# Altium PCB CT310高端控制盒基板电路V1.1.PcbDoc (part 1 of 3)
Units mil, origin at the board's own origin, x right, y up, seen from the top; angles counter-clockwise.
Board outline 8162.61 x 6196.81 mil, 2 copper layers (Top Layer, Bottom Layer), stack 65.792 mil thick; 275 components, 181 nets, 942 pads, 304 vias.
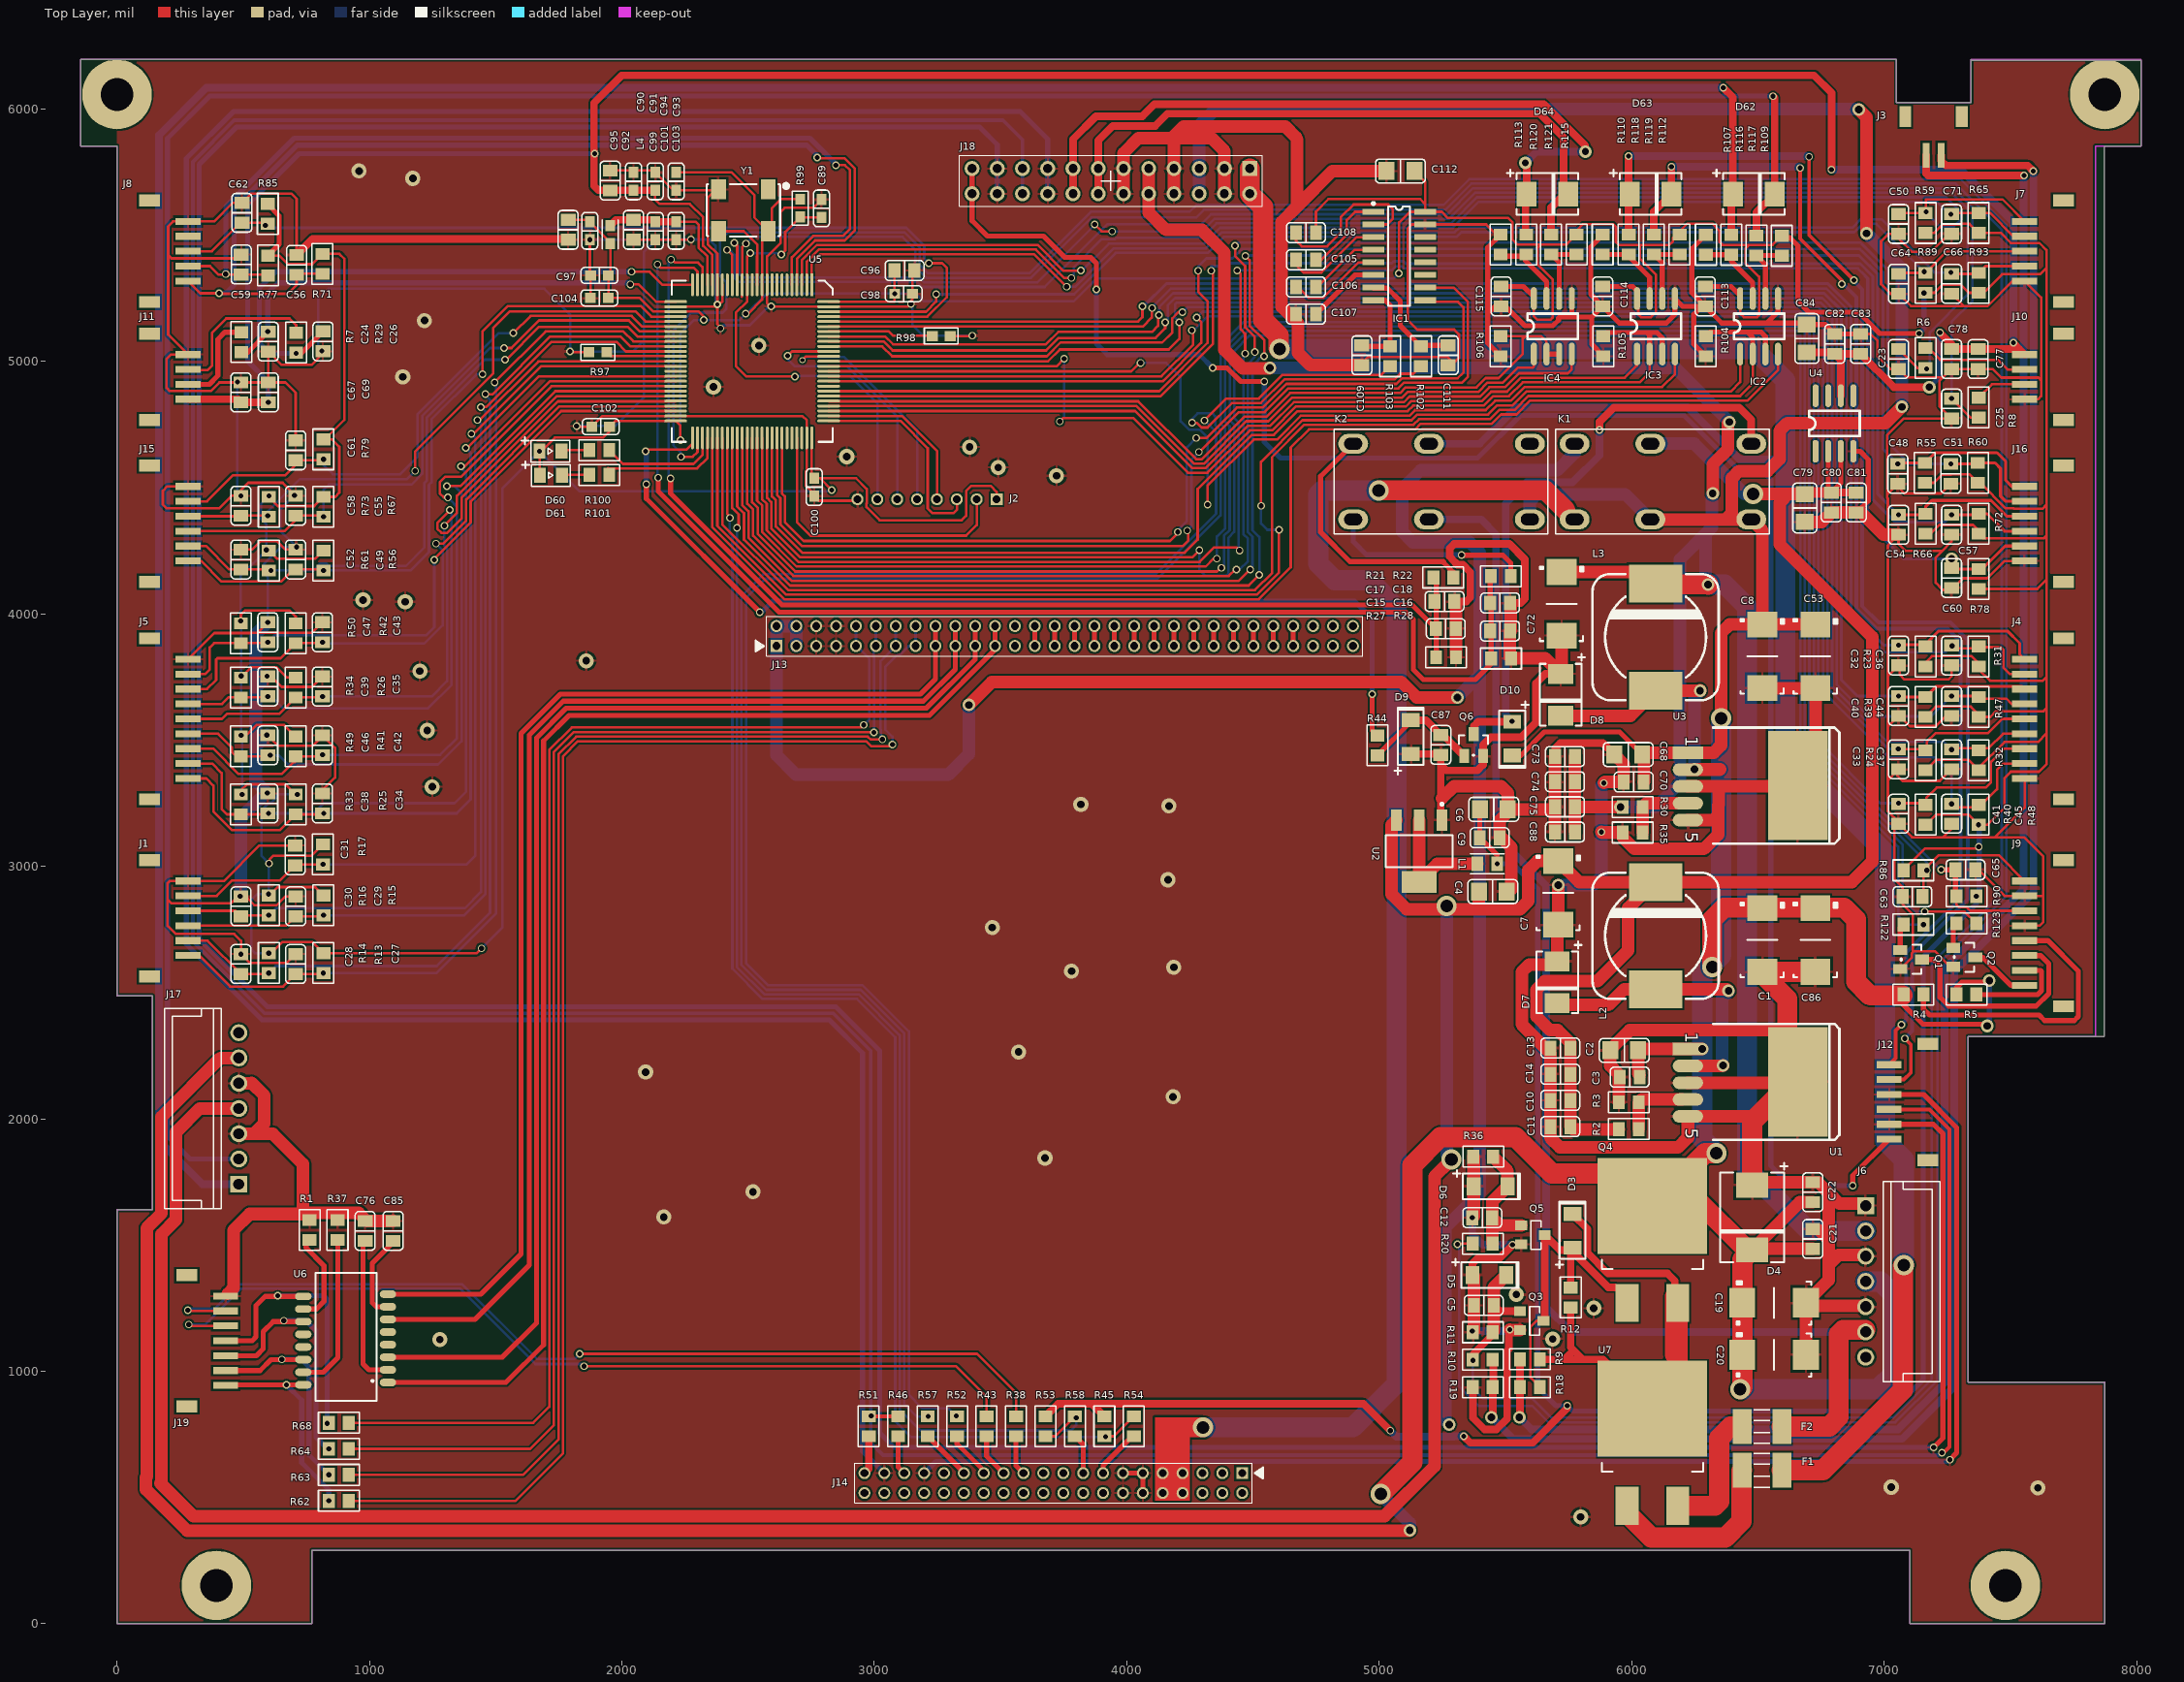
[diagram p0: Top Layer view]
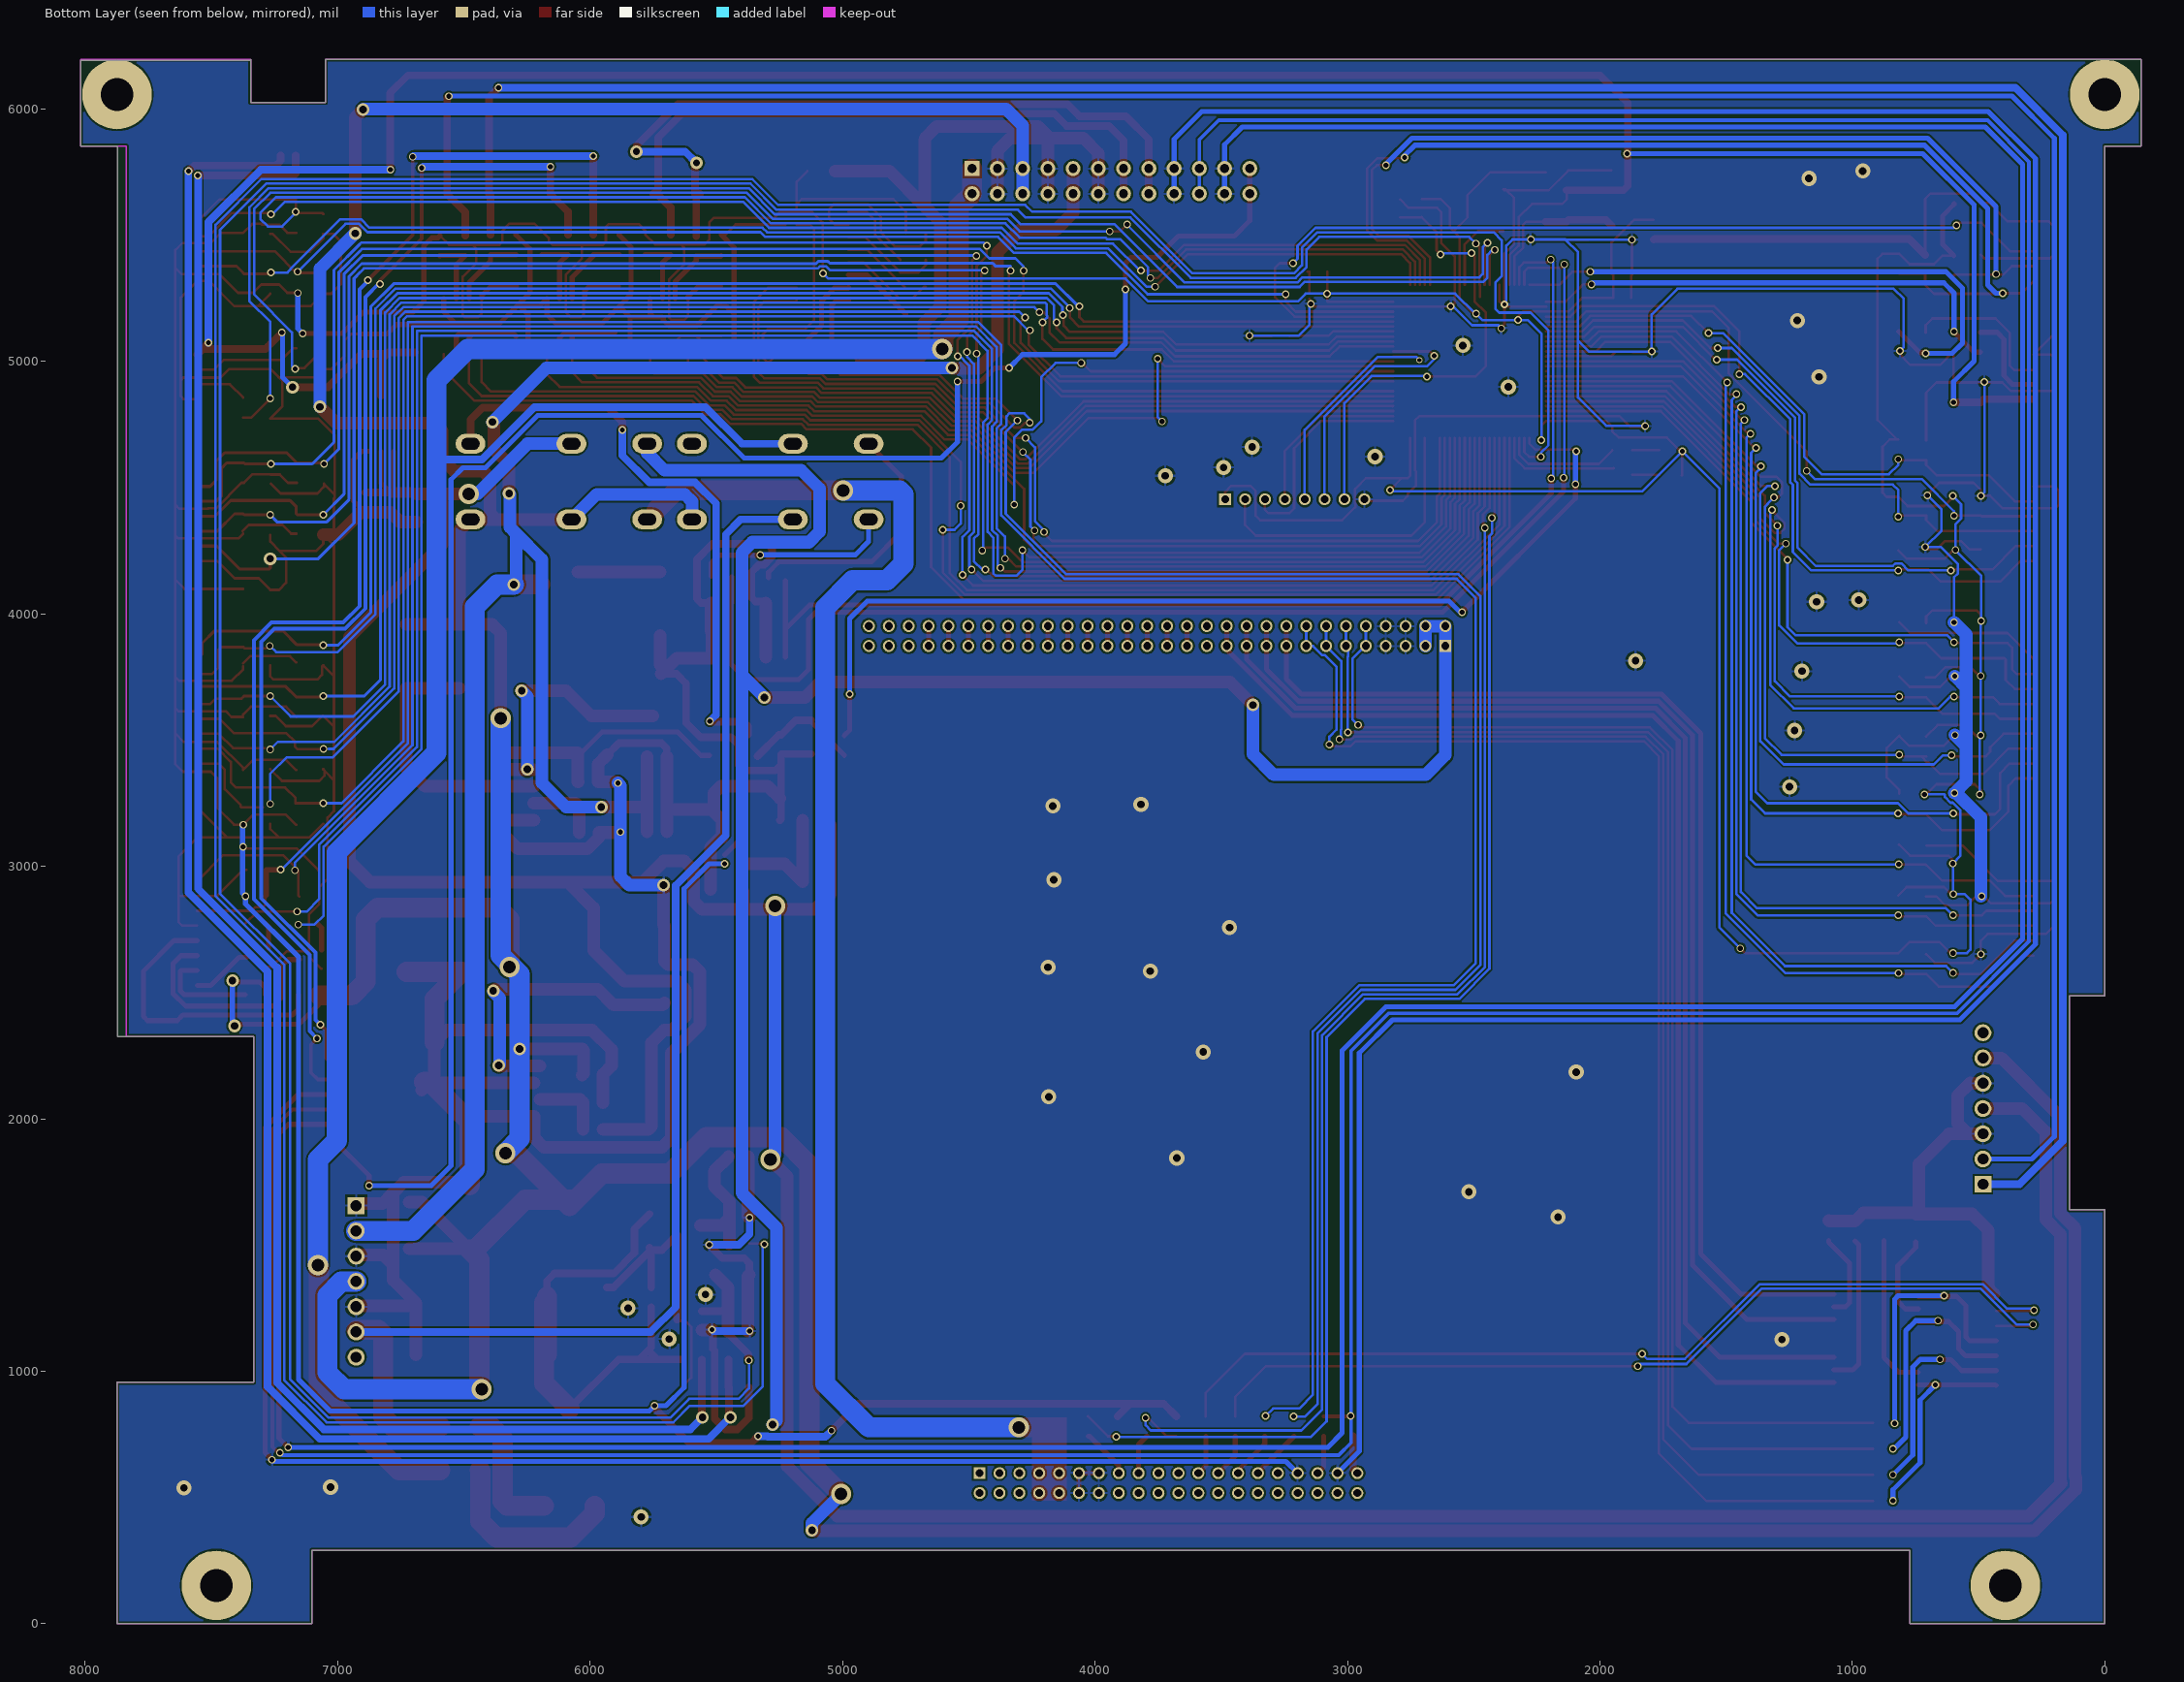
[diagram p1: Bottom Layer view, seen from below]
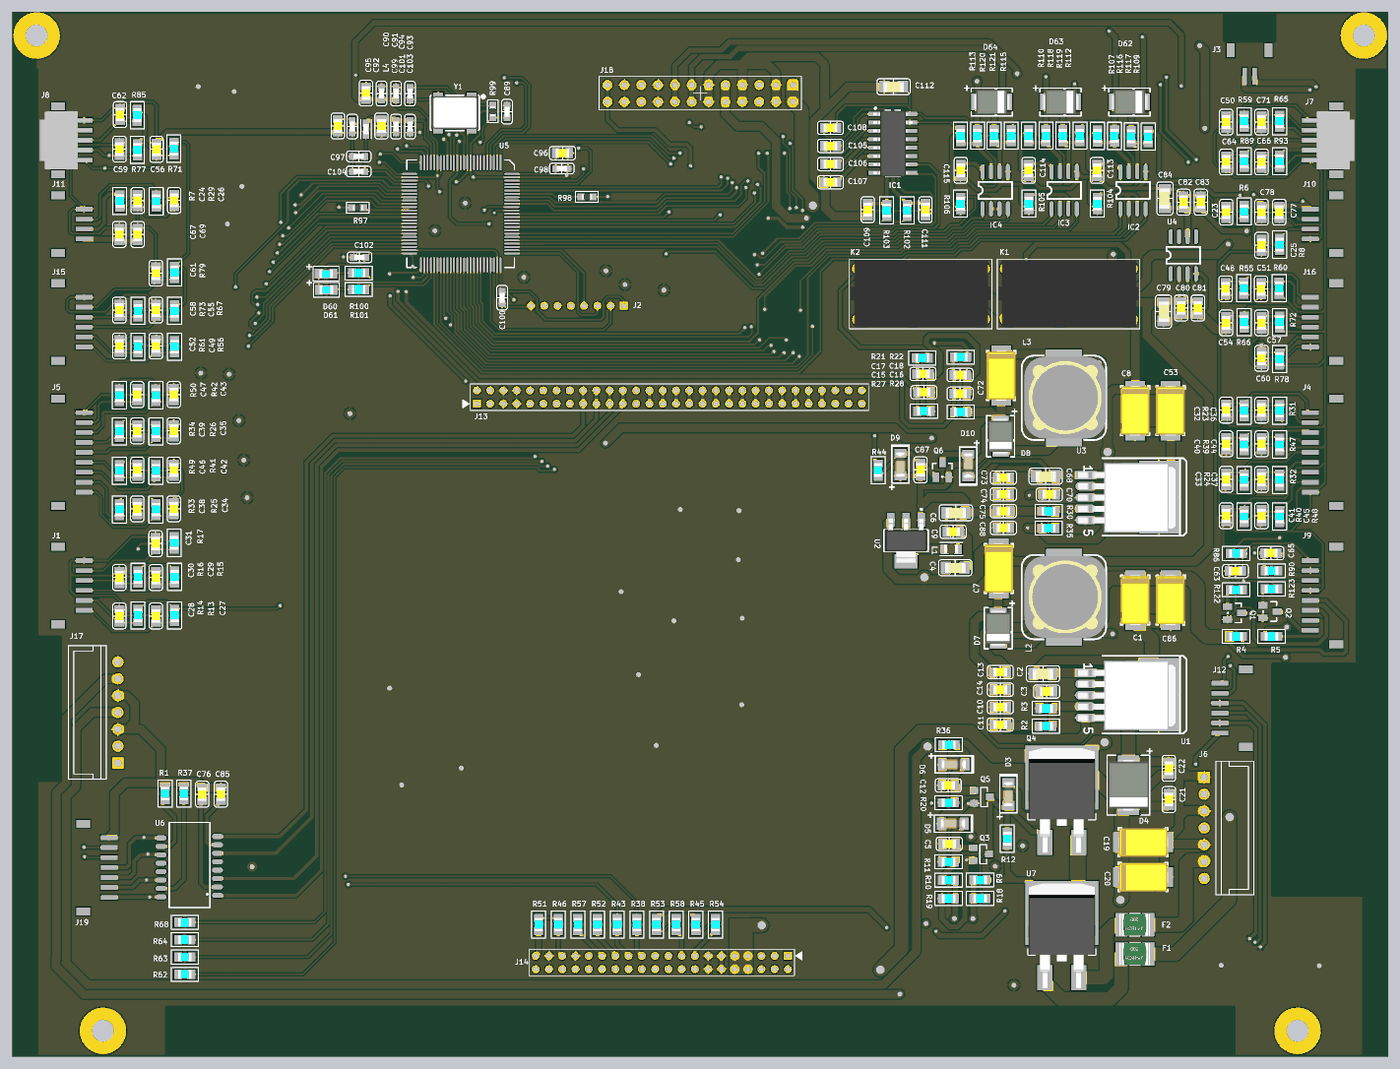
[diagram p4: 3D render of the assembled board from above, using the file's embedded part models]

## Layer stack, top to bottom
Top Layer: signal copper 1.4
Dielectric: core 62.9921, FR-4, Dk 4.8
Bottom Layer: signal copper 1.4

## Board outline
-144.3,5853 0,5853 0,2487 140.7,2487 140.7,1640 1.7,1640 0,1640 0,0 772.7,0 772.7,291.3 7101.31,291.3 7101.31,289 7101.31,0 7874.02,0 7874.02,5 7874.02,957 7332.7,957 7332.7,963 7332.7,2326 7872.7,2326 7872.7,5853 8018.31,5853 8018.31,6193 7344.7,6193 7344.7,6196.81 7344.7,6026 7048.7,6026 7048.7,6196.81 -144.3,6196.81 -144.3,5853

## Design rules (kind name [scope] priority, off if disabled: settings)
Clearance [All] p1: gap=8
HoleSize [All] p1: absolutevalues=TRUE maxlimit=200 minlimit=1 maxpercent=80.000 minpercent=20.000
PolygonConnect [All] p1: connectstyle=Relief reliefconductorwidth=10 reliefentries=4 polygonreliefangle="90 Angle" airgapwidth=10
RoutingVias [All] p1: holewidth=28 width=50 viastyle="Through Hole" minholewidth=16 minwidth=23 maxholewidth=50 maxwidth=100
SilkToSilkClearance [All] p1: silktosilkclearance=0
SilkToSolderMaskClearance SilkscreenOverComponentPads [IsPad] p1: minsilkscreentomaskgap=0 clearancetoexposedcopper=TRUE
SolderMaskExpansion [All] p1: expansion=4
Width [All] p1: maxlimit=100 minlimit=8 preferedwidth=10 minimp=50.000000 maximp=50.000000 favimp=50.000000
25 further rules are at their usual default settings.

## Classes and differential pairs
component class DataVideoPort: J18
component class TTL_TO_RS485: C113 C114 C115 D62 D63 D64 IC2 IC3 IC4 R104 R105 R106 R107 R109 R110 R112 R113 R115 R116 R117 R118 R119 R120 R121
component class TTL_TO_RS232: C105 C106 C107 C108 C109 C111 C112 IC1 R102 R103
component class RightInterface: J6 J12
component class Processor: C89 C90 C91 C92 C93 C94 C95 C96 C97 C98 C99 C100 C101 C102 C103 C104 D60 D61 J2 L4 R97 R98 R99 R100 R101 U5 Y1
component class PowerConvert: C1 C2 C3 C4 C6 C7 C8 C9 C10 C11 C13 C14 C53 C68 C70 C72 C73 C74 C75 C79 C80 C81 C82 C83 C84 C86 C88 D7 D8 L1 L2 L3 R2 R3 R30 R35 U1 U2 U3 U4
component class OmapSystem: J13 J14 P14 R38 R43 R45 R46 R51 R52 R53 R54 R57 R58
component class LeftInterface: C76 C85 J17 J19 R1 R37 R62 R63 R64 R68 U6
component class KeyInput_MG: C50 C56 C59 C62 C63 C64 C65 C66 C71 J7 J8 J9 P6 Q1 Q2 R4 R5 R59 R65 R71 R77 R85 R86 R89 R90 R93 R122 R123
component class KeyInput_IJMEF: C48 C49 C51 C52 C54 C55 C57 C58 C60 C61 J15 J16 R55 R56 R60 R61 R66 R67 R72 R73 R78 R79
component class KeyInput_ABH: C27 C28 C29 C30 C31 C32 C33 C34 C35 C36 C37 C38 C39 C40 C41 C42 C43 C44 C45 C46 C47 J1 J4 J5 R13 R14 R15 R16 R17 R23 R24 R25 R26 R31 R32 R33 R34 R39 R40 R41 R42 R47 R48 R49 R50
component class JoyStickAdcInput: C23 C24 C25 C26 C67 C69 C77 C78 J10 J11 R6 R7 R8 R29
component class PowerManager: C5 C12 C15 C16 C17 C18 C19 C20 C21 C22 C87 D3 D4 D5 D6 D9 D10 F1 F2 J3 K1 K2 Q3 Q4 Q5 Q6 R9 R10 R11 R12 R18 R19 R20 R21 R22 R27 R28 R36 R44 U7

## Components (designator, comment, footprint, x,y, rotation, side; value= is the part's Value field where it differs from the comment)
C1 "100uF/25V" CT7343-E-S 6517.7,2708 r270 top
C2 "2.2uF" C1206 5970.41,2271.3 r0 top
C3 "0.1uF" C0805 5992.06,2165.3 r0 top
C4 "22uF" C1206 5449.7,2900 r0 top
C5 "0.1uF" C0805 5414,1261.3 r0 top
C6 "22uF" C1206 5453.7,3226 r0 top
C7 "100uF/25V" CT7343-E-S 5708.7,2895 r270 top
C8 "100uF/25V" CT7343-E-S 6517.7,3832 r270 top
C9 "0.1uF" C0805 5437.35,3113.3 r180 top
C10 "0.1uF" C0805 5717.41,2072.96 r0 top
C11 "0.1uF" C0805 5717.41,1969.3 r0 top
C12 "100pF" C0805 5408,1608.3 r0 top
C13 "100pF" C0805 5717.41,2280.3 r0 top
C14 "10uF" C0805 5717.41,2176.63 r0 top
C15 "10uF" C0805 5263.41,3941.3 r0 top
C16 "10uF" C0805 5478.41,3932.31 r0 top
C17 "0.1uF" C0805 5258.41,4049.3 r0 top
C18 "0.1uF" C0805 5478.41,4043.3 r0 top
C19 "100uF/25V" CT7343-E-S 6564,1271.3 r0 top
C20 "100uF/25V" CT7343-E-S 6564,1065 r0 top
C21 "0.1uF" C0805 6717,1524.3 r270 top
C22 "10uF" C0805 6717,1709.3 r270 top
C23 "100pF" C0805 7057,5009.36 r270 top
C24 "100pF" C0805 599.35,5078.3 r270 top
C25 "100pF" C0805 7267.02,4813.36 r270 top
C26 "100pF" C0805 816,5079.3 r270 top
C27 "100pF" C0805 707.68,2613.05 r90 top
C28 "100pF" C0805 491.03,2613.05 r90 top
C29 "100pF" C0805 707.68,2841.55 r90 top
C30 "100pF" C0805 491.03,2841.55 r90 top
C31 "100pF" C0805 705.68,3043.3 r90 top
C32 "100pF" C0805 7057,3835.23 r270 top
C33 "100pF" C0805 7057,3424.23 r270 top
C34 "100pF" C0805 814,3249.23 r90 top
C35 "100pF" C0805 814,3712.3 r90 top
C36 "100pF" C0805 7267.02,3835.23 r270 top
C37 "100pF" C0805 7267.02,3424.23 r270 top
C38 "100pF" C0805 597.35,3249.23 r90 top
C39 "100pF" C0805 597.35,3712.3 r90 top
C40 "100pF" C0805 7057,3635.23 r270 top
C41 "100pF" C0805 7057,3208.23 r270 top
C42 "100pF" C0805 814,3479.23 r90 top
C43 "100pF" C0805 814,3927.3 r90 top
C44 "100pF" C0805 7267.02,3635.23 r270 top
C45 "100pF" C0805 7267.02,3208.23 r270 top
C46 "100pF" C0805 597.35,3479.23 r90 top
C47 "100pF" C0805 597.35,3927.3 r90 top
C48 "100pF" C0805 7054,4554.73 r270 top
C49 "100pF" C0805 707.68,4215.23 r90 top
C50 "100pF" C0805 7057,5544.36 r270 top
C51 "100pF" C0805 7264.02,4554.73 r270 top
C52 "100pF" C0805 491.03,4215.23 r90 top
C53 "100uF/25V" CT7343-E-S 6727.7,3832 r270 top
C54 "100pF" C0805 7057,4352.86 r270 top
C55 "100pF" C0805 707.68,4428.23 r90 top
C56 "100pF" C0805 711.61,5382.42 r90 top
C57 "100pF" C0805 7267.02,4352.86 r270 top
C58 "100pF" C0805 491.03,4428.23 r90 top
C59 "100pF" C0805 492.06,5383.58 r90 top
C60 "100pF" C0805 7267.02,4142.23 r270 top
C61 "100pF" C0805 707.68,4647.73 r90 top
C62 "100pF" C0805 494.97,5588.58 r90 top
C63 "100pF" C0805 7112.06,2880.3 r180 top
C64 "100pF" C0805 7057,5307.36 r270 top
C65 "100pF" C0805 7322.06,2986.3 r0 top
C66 "100pF" C0805 7267,5307.36 r270 top
C67 "100pF" C0805 491.03,4877.3 r90 top
C68 "2.2uF" C1206 5985.99,3442.87 r0 top
C69 "1uF" C0805 599.35,4877.3 r90 top
C70 "0.1uF" C0805 6007.64,3334.02 r0 top
C71 "100pF" C0805 7267,5544.36 r270 top
C72 "100uF/25V" CT7343-E-S 5722.7,4040 r270 top
C73 "0.1uF" C0805 5735.7,3435 r0 top
C74 "0.1uF" C0805 5735.7,3335.33 r0 top
C75 "100pF" C0805 5735.7,3235.67 r0 top
C76 "0.01uF" C0805 982.72,1556 r90 top
C77 "100pF" C0805 7372.01,5009.36 r270 top
C78 "1uF" C0805 7267,5009.36 r270 top
C79 "22uF" C1206 6685.41,4419.3 r90 top
C80 "0.1uF" C0805 6790.41,4440.95 r90 top
C81 "100pF" C0805 6889.41,4440.95 r90 top
C82 "100pF" C0805 6804.41,5069.08 r270 top
C83 "0.1uF" C0805 6906.41,5069.08 r270 top
C84 "22uF" C1206 6693.7,5090.73 r270 top
C85 "0.01uF" C0805 1093.7,1556 r90 top
C86 "100uF/25V" CT7343-E-S 6727.7,2708 r270 top
C87 "100pF" C0805 5243.7,3481 r90 top
C88 "10uF" C0805 5735.7,3136 r0 top
C89 "0.1uF" C0603 2790.7,5606 r90 top
C90 "10uF" C0805 1953.7,5716 r90 top
C91 "0.1uF" C0603 2046.06,5713.29 r90 top
C92 "0.1uF" C0603 1873,5517.36 r90 top
C93 "0.1uF" C0603 2215,5713.3 r90 top
C94 "100pF" C0603 2132,5713.29 r90 top
C95 "10uF" C0805 1787,5521.29 r90 top
C96 "10uF" C0805 3119.7,5360 r0 top
C97 "0.1uF" C0603 1911,5340.3 r180 top
C98 "0.1uF" C0603 3115.91,5268.3 r0 top
C99 "10uF" C0805 2046.06,5521.29 r90 top
C100 "0.1uF" C0603 2761.7,4502 r270 top
C101 "0.1uF" C0603 2132,5517.36 r90 top
C102 "0.1uF" C0603 1915.91,4741.3 r180 top
C103 "100pF" C0603 2215,5517.36 r90 top
C104 "0.1uF" C0603 1910.91,5251.3 r180 top
C105 "0.1uF" C0805 4709.65,5402.36 r0 top
C106 "0.1uF" C0805 4709.65,5294.83 r0 top
C107 "15pF" C0805 4709.65,5187.3 r180 top
C108 "0.1uF" C0805 4709.65,5509.89 r180 top
C109 "15pF" C0805 4931,5024.23 r270 top
C111 "15pF" C0805 5273,5024.23 r270 top
C112 "10uF" C1206 5084,5754 r0 top
C113 "0.1uF" C0805 6291.13,5257.58 r90 top
C114 "0.1uF" C0805 5884.95,5257.58 r90 top
C115 "0.1uF" C0805 5482.7,5257.58 r90 top
D3 "ZMM16" SOD-80 5765,1556.3 r90 top
D4 "1.5SMC15A" SMC 6477,1609.3 r270 top
D5 "ZMM1" SOD-80 5436,1381.3 r0 top
D6 "ZMM1" SOD-80 5441,1732.3 r0 top
D7 "SK58" SMB 5704.77,2541 r270 top
D8 "SK58" SMB 5718.7,3680 r270 top
D9 "ZMM1" SOD-80 5124.7,3512 r90 top
D10 "1N4148" SOD-80 5526.7,3506 r270 top
D60 "LED-G" LED0805 1717,4644.3 r0 top
D61 "LED-G" LED0805 1718.96,4548.69 r0 top
D62 "1.5SMC6.8CA" SMB 6483.4,5663.02 r0 top
D63 "1.5SMC6.8CA" SMB 6074.9,5663.02 r0 top
D64 "1.5SMC6.8CA" SMB 5666.4,5663.02 r0 top
F1 "2.5A" F1812 6515.7,608 r180 top
F2 "2.5A" F1812 6515.7,781 r180 top
IC1 "SP3232EEN" SO16-150 5079,5417.3 r270 top
IC2 "SP3078EEN-L/TR" SO-8 6429.73,5029.02 r90 top
IC3 "SP3078EEN-L/TR" SO-8 6021.24,5029.02 r90 top
IC4 "SP3078EEN-L/TR" SO-8 5612.73,5029.02 r90 top
J1 "ZH1X6WT-1.5" ZH1X6WT-1.5 205,2794.35 r90 top
J2 "HD1X8-2.00" SHD1X8-2.00 3208.7,4454 r180 top
J3 "ZH1X2WT-1.5" ZH1X2WT-1.5 7195.7,5893 r0 top
J4 "ZH1X9WT-1.5" ZH1X9WT-1.5 7633,3584.3 r270 top
J5 "ZH1X9WT-1.5" ZH1X9WT-1.5 205,3584.3 r90 top
J6 "DS1X7-2.54" DS1X7H-2.54 6926.7,1356 r90 top
J7 "ZH1X5WT-1.5" ZH1X5WT-1.5 7633,5436.3 r270 top
J8 "ZH1X5WT-1.5" ZH1X5WT-1.5 205,5436.3 r90 top
J9 "ZH1X8WT-1.5" ZH1X8WT-1.5 7633,2735.3 r270 top
J10 "ZH1X4WT-1.5" ZH1X4WT-1.5 7633,4938.69 r270 top
J11 "ZH1X4WT-1.5" ZH1X4WT-1.5 205,4938.69 r90 top
J12 "ZH1X6WT-1.5" ZH1X6WT-1.5 7096.7,2067 r270 top
J13 "HEADER 30X2" HD2X30-2.00 3753.88,3912.24 r0 top
J14 "HEADER 2X20" HD2X20-2.00 3708.93,557.24 r180 top
J15 "ZH1X6WT-1.5" ZH1X6WT-1.5 205,4357.3 r90 top
J16 "ZH1X6WT-1.5" ZH1X6WT-1.5 7633,4357.3 r270 top
J17 "DS1X7-2.54" DS1X7H-2.54 482.7,2041 r270 top
J18 "HD2X12-2.54" HD2X12-2.54 3936.75,5713.97 r180 top
J19 "ZH1X7WT-1.5" ZH1X7WT-1.5 353.7,1121 r90 top
K1 "G6B-2214P-US" G6B-2214P-Us 6123.7,4524 r180 top
K2 "G6B-2214P-US" G6B-2214P-Us 5246.7,4524 r180 top
L1 "10uH" L0805-C 5427.5,3010.3 r180 top
L2 "22uH" L5050-P 6094.7,2725.3 r270 top
L3 "22uH" L5050-P 6094.7,3908 r270 top
L4 "10uH" L0603-C 1954,5502.61 r90 top
Q1 "8050" SOT-23#1 7107.16,2631.3 r270 top
Q2 "8050" SOT-23#1 7317.16,2639.3 r270 top
Q3 "S8050" SOT-23#2 5604,1200.3 r90 top
Q4 "IRF5210S" TO-262 6082,1655.3 r0 top
Q5 "S8050" SOT-23#2 5609,1540.3 r90 top
Q6 "S8050" SOT-23#1 5373.7,3480 r0 top
R1 "75R" R0805 762.7,1559.94 r90 top
R2 "10K" R0805 5988.13,1959.3 r0 top
R3 "3.3K" R0805 5988.13,2065.6 r0 top
R4 "1K" R0805 7116,2492.3 r0 top
R5 "1K" R0805 7326,2492.3 r0 top
R6 "10R" R0805 7163.98,5013.29 r90 top
R7 "10R" R0805 493,5076.3 r90 top
R8 "10R" R0805 7374,4817.3 r90 top
R9 "0R" R0805 5597,1047.3 r0 top
R10 "20K" R0805 5410,1045.95 r180 top
R11 "2K" R0805 5410,1154.61 r0 top
R12 "10K" R0805 5758.11,1292.36 r90 top
R13 "4.7K" R0805 817.97,2616.98 r90 top
R14 "4.7K" R0805 601.32,2616.98 r90 top
R15 "4.7K" R0805 817.97,2845.48 r90 top
R16 "4.7K" R0805 601.32,2845.48 r90 top
R17 "4.7K" R0805 815.97,3047.23 r90 top
R18 "0R(N.C)" R0805 5597,937.3 r0 top
R19 "0R(N.C)" R0805 5410,937.3 r0 top
R20 "1K" R0805 5410,1505.3 r0 top
R21 "20K" R0805 5253.7,4144 r180 top
R22 "20K" R0805 5481.7,4149 r180 top
R23 "4.7K" R0805 7163.98,3831.3 r270 top
R24 "4.7K" R0805 7163.98,3420.3 r270 top
R25 "4.7K" R0805 707.65,3245.3 r90 top
R26 "4.7K" R0805 707.65,3708.36 r90 top
R27 "1K" R0805 5264.41,3828.3 r180 top
R28 "1K" R0805 5482.35,3823.28 r180 top
R29 "10R" R0805 709.65,5074.3 r90 top
R30 "16K" R0805 6003.7,3235.01 r0 top
R31 "4.7K" R0805 7374,3831.3 r270 top
R32 "4.7K" R0805 7374,3420.3 r270 top
R33 "4.7K" R0805 491,3245.3 r90 top
R34 "4.7K" R0805 491,3708.36 r90 top
R35 "3.3K" R0805 6003.7,3134.03 r0 top
R36 "1K" R0805 5411.94,1850 r0 top
R37 "75R" R0805 873.69,1559.94 r90 top
R38 "10R" R0805 3561.04,782 r90 top
R39 "4.7K" R0805 7163.98,3631.3 r270 top
R40 "4.7K" R0805 7163.98,3204.3 r270 top
R41 "4.7K" R0805 707.65,3475.3 r90 top
R42 "4.7K" R0805 707.65,3923.36 r90 top
R43 "10R" R0805 3444.37,782 r90 top
R44 "1K" R0805 4992.7,3479 r270 top
R45 "330R" R0805 3911.04,782 r270 top
R46 "0R" R0805 3094.37,782 r90 top
R47 "4.7K" R0805 7374,3631.29 r270 top
R48 "4.7K" R0805 7374,3204.29 r270 top
R49 "4.7K" R0805 491,3475.3 r90 top
R50 "4.7K" R0805 491,3923.36 r90 top
R51 "0R(NC)" R0805 2977.7,782 r90 top
R52 "10R" R0805 3327.7,782 r90 top
R53 "330R" R0805 3677.7,782 r270 top
R54 "330R" R0805 4027.7,782 r90 top
R55 "4.7K" R0805 7160.98,4558.67 r270 top
R56 "4.7K" R0805 817.97,4211.3 r90 top
R57 "10R" R0805 3211.04,782 r90 top
R58 "330R" R0805 3794.37,782 r90 top
R59 "4.7K" R0805 7163.98,5548.3 r270 top
R60 "4.7K" R0805 7371,4558.67 r270 top
R61 "4.7K" R0805 601.32,4211.3 r90 top
R62 "10R" R0805 878.7,487 r0 top
R63 "10R" R0805 878.7,590 r0 top
R64 "10R" R0805 878.7,693 r0 top
R65 "4.7K" R0805 7373.98,5548.3 r270 top
R66 "4.7K" R0805 7163.98,4356.8 r270 top
R67 "4.7K" R0805 817.97,4424.29 r90 top
R68 "10R" R0805 878.7,796 r0 top
R71 "4.7K" R0805 814.03,5386.36 r90 top
R72 "4.7K" R0805 7374,4356.8 r270 top
R73 "4.7K" R0805 601.32,4424.29 r90 top
R77 "4.7K" R0805 598.41,5379.64 r90 top
R78 "4.7K" R0805 7374,4138.3 r270 top
R79 "4.7K" R0805 817.97,4651.67 r90 top
R85 "4.7K" R0805 597.39,5584.64 r90 top
R86 "4.7K" R0805 7116,2984.3 r180 top
R89 "4.7K" R0805 7163.98,5311.3 r270 top
R90 "4.7K" R0805 7326,2881.77 r0 top
R93 "4.7K" R0805 7373.98,5311.3 r270 top
R97 "10K" R0603 1905,5036.3 r180 top
R98 "10K" R0603 3264.7,5100.3 r180 top
R99 "10K" R0603 2706,5607.3 r270 top
R100 "470R" R0805 1910.91,4648.3 r180 top
R101 "470R" R0805 1910.91,4550.69 r180 top
R102 "10R" R0805 5165,5020.3 r270 top
R103 "10R" R0805 5043,5020.3 r270 top
R104 "10K" R0805 6293.1,5060.02 r270 top
R105 "10K" R0805 5886.92,5060.02 r270 top
R106 "10K" R0805 5480.73,5060.02 r270 top
R107 "10K" R0805 6293.73,5462.02 r90 top
R109 "10K" R0805 6594.73,5458.02 r270 top
R110 "10K" R0805 5884.73,5463.01 r90 top
R112 "10K" R0805 6189.73,5463.02 r270 top
R113 "10K" R0805 5480.73,5463.01 r90 top
R115 "10K" R0805 5781.73,5463.01 r270 top
R116 "10R" R0805 6394.73,5462.02 r270 top
R117 "10R" R0805 6493.73,5459.02 r270 top
R118 "10R" R0805 5987.73,5463.02 r270 top
R119 "10R" R0805 6087.73,5463.02 r270 top
R120 "10R" R0805 5582.28,5463.02 r270 top
R121 "10R" R0805 5680.73,5463.02 r270 top
R122 "1K" R0805 7116,2769.3 r0 top
R123 "1K" R0805 7326,2774.3 r0 top
U1 "LM2596_ADJ" TO263 6222.6,2276.3 r270 top
U2 "AMS1117-3.3" SOT-223 5158,3060.3 r180 top
U3 "LM2596_ADJ" TO263 6222.6,3449.83 r270 top
U4 "REF192" SO-8 6728.41,4644.02 r90 top
U5 "STM32F103VCT6" STM32F103VCT6 2516,5000.3 r270 top
U6 "H1102NL" SOP16 905.7,1126 r180 top
U7 "MBRB60H100CTT4G" TO-262 6082,852 r0 top
Y1 "XTAL 8MHz" "XTAL 5.0X7.0-SM" 2481,5598.3 r180 top

## Footprints (in the part's own frame and the unit in brackets; to place one, negate y for a bottom-side part, rotate by r counter-clockwise, add the part's x,y. Pads: shape width x height; smd on the part's side, far side on the other; paste and mask are expansions set on the pad)
C0603 [mm]
  rect 1.1x1 smd: 1(-0.9,0) 2(0.9,0)
  silkscreen extent -1.85,-0.8 1.85,0.8, body extent -0.76,-0.39 0.76,0.38, height 0.46
C0805 [mm]
  rect 1.2x1.5 smd: 1(-1,0) 2(1,0)
  silkscreen extent -1.95,-1 1.95,1, body extent -1.02,-0.64 1.02,0.64, height 0.61
C1206 [mm]
  rect 1.6x1.8 smd: 1(-1.4,0) 2(1.4,0)
  silkscreen extent -2.5,-1.2 2.5,1.2, body extent -1.52,-0.82 1.52,0.71, height 0.61
CT7343-E-S [mm]
  rect 2.6x3 smd: 1(-3.2,0) 2(3.2,0)
  silkscreen extent -3.75,-2.2 3.75,2.2, body extent -3.75,-2.2 3.75,2.12, height 4
DS1X7H-2.54 [mm]
  rect 1.7x1.7 hole 1.1: 1(7.62,0)
  round 1.7 hole 1.1: 2(5.08,0) 3(2.54,0) 4(0,0) 5(-2.54,0) 6(-5.08,0) 7(-7.62,0)
  silkscreen extent -10.08,-7.47 10.06,-1.77
F1812 [mm]
  rect 1.9x3.5 smd: 1(-2,0) 2(2,0)
  silkscreen extent -0.8,-1.7 0.8,1.7, body extent -2.29,-1.65 2.31,1.65, height 0.69
G6B-2214P-Us [mm]
  oval 3x2 hole 1.2 slot 1.8 at 0 deg: 1(-8.89,-3.81) 3(1.27,-3.81) 4(8.89,-3.81) 5(8.89,3.81) 6(1.27,3.81) 8(-8.89,3.81)
  silkscreen extent -10.69,-5.26 10.79,5.26, body extent -10.48,-5.08 10.62,4.92, height 12.5
HD2X12-2.54 [mm]
  rect 1.5x1.5 hole 0.9: 1(-13.97,-1.27)
  round 1.5 hole 0.9: 2(-13.97,1.27) 3(-11.43,-1.27) 4(-11.43,1.27) 5(-8.89,-1.27) 6(-8.89,1.27) 7(-6.35,-1.27) 8(-6.35,1.27) 9(-3.81,-1.27) 10(-3.81,1.27) 11(-1.27,-1.27) 12(-1.27,1.27) 13(1.27,-1.27) 14(1.27,1.27) 15(3.81,-1.27) 16(3.81,1.27) 17(6.35,-1.27) 18(6.35,1.27) 19(8.89,-1.27) 20(8.89,1.27) 21(11.43,-1.27) 22(11.43,1.27) 23(13.97,-1.27) 24(13.97,1.27)
  silkscreen extent -15.24,-2.57 15.24,2.51
HD2X20-2.00 [mm]
  rect 1.2x1.2 hole 0.8: 1(-19,-1)
  round 1.2 hole 0.8: 2(-19,1) 3(-17,-1) 4(-17,1) 5(-15,-1) 6(-15,1) 7(-13,-1) 8(-13,1) 9(-11,-1) 10(-11,1) 11(-9,-1) 12(-9,1) 13(-7,-1) 14(-7,1) 15(-5,-1) 16(-5,1) 17(-3,-1) 18(-3,1) 19(-1,-1) 20(-1,1) 21(1,-1) 22(1,1) 23(3,-1) 24(3,1) 25(5,-1) 26(5,1) 27(7,-1) 28(7,1) 29(9,-1) 30(9,1) 31(11,-1) 32(11,1) 33(13,-1) 34(13,1) 35(15,-1) 36(15,1) 37(17,-1) 38(17,1) 39(19,-1) 40(19,1)
  silkscreen extent -21.09,-2.01 20,1.99
HD2X30-2.00 [mm]
  rect 1.2x1.2 hole 0.8: 1(-29,-1)
  round 1.2 hole 0.8: 2(-29,1) 3(-27,-1) 4(-27,1) 5(-25,-1) 6(-25,1) 7(-23,-1) 8(-23,1) 9(-21,-1) 10(-21,1) 11(-19,-1) 12(-19,1) 13(-17,-1) 14(-17,1) 15(-15,-1) 16(-15,1) 17(-13,-1) 18(-13,1) 19(-11,-1) 20(-11,1) 21(-9,-1) 22(-9,1) 23(-7,-1) 24(-7,1) 25(-5,-1) 26(-5,1) 27(-3,-1) 28(-3,1) 29(-1,-1) 30(-1,1) 31(1,-1) 32(1,1) 33(3,-1) 34(3,1) 35(5,-1) 36(5,1) 37(7,-1) 38(7,1) 39(9,-1) 40(9,1) 41(11,-1) 42(11,1) 43(13,-1) 44(13,1) 45(15,-1) 46(15,1) 47(17,-1) 48(17,1) 49(19,-1) 50(19,1) 51(21,-1) 52(21,1) 53(23,-1) 54(23,1) 55(25,-1) 56(25,1) 57(27,-1) 58(27,1) 59(29,-1) 60(29,1)
  silkscreen extent -31.09,-2.01 30,1.99
L0603-C [mm]
  rect 1.1x1 smd: 1(-0.9,0) 2(0.9,0)
  silkscreen extent -1.45,-0.8 1.45,0.8, body extent -0.76,-0.39 0.76,0.38, height 0.46
L0805-C [mm]
  rect 1.2x1.5 smd: 1(-1,0) 2(1,0)
  silkscreen extent -1.7,-1 1.7,1, body extent -0.95,-0.65 1.08,0.63, height 0.61
L5050-P [mm]
  rect 3.8x5.4 smd: 1(-5.4,0) 2(5.4,0)
  silkscreen extent -6.35,-6.35 6.35,6.35, body extent -6.18,-5.97 6.12,6.33, height 6
LED0805 [mm]
  rect 1.2x1.5 smd: 1(-1.1,0) 2(1.1,0)
  silkscreen extent -2.9,-1.1 1.95,1.4, body extent -1.02,-0.64 1.02,0.64, height 0.56
R0603 [mm]
  rect 1.1x1 smd: 1(-0.9,0) 2(0.9,0)
  silkscreen extent -1.7,-0.8 1.7,0.8, body extent -0.79,-0.39 0.74,0.38, height 0.46
R0805 [mm]
  rect 1.2x1.4 smd: 1(-1,0) 2(1,0)
  silkscreen extent -2.05,-1.05 2.05,1.05, body extent -1.02,-0.65 1.02,0.62, height 0.61
SHD1X8-2.00 [mm]
  rect 1.2x1.2 hole 0.762: 1(-7,0)
  round 1.2 hole 0.762: 2(-5,0) 3(-3,0) 4(-1,0) 5(1,0) 6(3,0) 7(5,0) 8(7,0)
SMB [mm]
  rect 2x2.5 smd: 1(-2.1,0) 2(2.1,0)
  silkscreen extent -4.1,-2.1 3.1,2.45, body extent -2.79,-1.91 2.81,1.89, height 2.4
SMC [mm]
  rect 2.5x3.2 smd: 1(-3.25,0) 2(3.25,0)
  silkscreen extent -5.5,-3.2 4.5,3.55, body extent -3.8,-3.1 3.8,3.12, height 2.8
SO16-150 [mm]
  rect 0.6x2.2 smd: 1(-4.445,-2.6) 2(-3.175,-2.6) 3(-1.905,-2.6) 4(-0.635,-2.6) 5(0.635,-2.6) 6(1.905,-2.6) 7(3.175,-2.6) 8(4.445,-2.6) 9(4.445,2.6) 10(3.175,2.6) 11(1.905,2.6) 12(0.635,2.6) 13(-0.635,2.6) 14(-1.905,2.6) 15(-3.175,2.6) 16(-4.445,2.6)
  silkscreen extent -5.42,-2.72 5,1.1, body extent -4.95,-2.92 5.02,3.02, height 1.35
SO-8 [mil]
  oval 90x24 smd: 1(0.04,0.29) 2(0.04,-49.71) 3(0.04,-99.71) 4(0.04,-149.71) 5(220.04,-149.71) 6(220.04,-99.71) 7(220.04,-49.71) 8(220.04,0.29)
  silkscreen extent 60,-175 160,25
SOD-80 [mm]
  rect 1.4x1.8 smd: 1(-1.7,0) 2(1.7,0)
  silkscreen extent -3.75,-1.3 3.03,1.65, body extent -1.85,-0.79 1.85,0.81, height 1.6
SOP16 [mm]
  oval 1.65x0.76 smd: 1(-4.257,4.331) 2(-4.257,3.061) 3(-4.257,1.791) 4(-4.257,0.521) 5(-4.257,-0.749) 6(-4.257,-2.019) 7(-4.257,-3.289) 8(-4.257,-4.559) 9(4.257,-4.331) 10(4.257,-3.061) 11(4.257,-1.791) 12(4.257,-0.521) 13(4.257,0.749) 14(4.257,2.019) 15(4.257,3.289) 16(4.257,4.559)
  silkscreen extent -3.13,-6.68 3.02,6.17
SOT-23#1 [mm]
  rect 1x1.4 smd: 1(-0.95,-1.1) 2(0.95,-1.1) 3(0,1.1)
  silkscreen extent -1.47,-1.02 1.45,1, body extent -1.41,-1 1.38,1.42, height 1.09
SOT-23#2 [mm] "SOT-23"
  rect 1x1.2 smd: 1(0.953,1.175) 2(-0.953,1.175) 3(-0.013,-1.175)
  silkscreen extent -1.46,-0.81 1.44,0.21
SOT-223 [mm]
  rect 1.1x2.15 smd: 1(-2.3,-3.1) 2(0,-3.1) 3(2.3,-3.1)
  rect 3.5x2.15 smd: 4(0,3.1)
  silkscreen extent -3.35,-4.85 3.35,1.63, body extent -3.15,-3.3 3.15,3.3, height 1.8
STM32F103VCT6 [mil]
  rect 90x11.5 smd: 1(-303.15,236.22)
  oval 90x11.5 smd: 2(-303.15,216.53) 3(-303.15,196.85) 4(-303.15,177.16) 5(-303.15,157.48) 6(-303.15,137.8) 7(-303.15,118.11) 8(-303.15,98.43) 9(-303.15,78.74) 10(-303.15,59.06) 11(-303.15,39.37) 12(-303.15,19.68) 13(-303.15,0) 14(-303.15,-19.69) 15(-303.15,-39.37) 16(-303.15,-59.06) 17(-303.15,-78.74) 18(-303.15,-98.43) 19(-303.15,-118.11) 20(-303.15,-137.8) 21(-303.15,-157.48) 22(-303.15,-177.17) 23(-303.15,-196.85) 24(-303.15,-216.53) 25(-303.15,-236.22) 51(303.15,-236.22) 52(303.15,-216.53) 53(303.15,-196.85) 54(303.15,-177.16) 55(303.15,-157.48) 56(303.15,-137.8) 57(303.15,-118.11) 58(303.15,-98.43) 59(303.15,-78.74) 60(303.15,-59.06) 61(303.15,-39.37) 62(303.15,-19.69) 63(303.15,0) 64(303.15,19.68) 65(303.15,39.37) 66(303.15,59.06) 67(303.15,78.74) 68(303.15,98.43) 69(303.15,118.11) 70(303.15,137.8) 71(303.15,157.48) 72(303.15,177.17) 73(303.15,196.85) 74(303.15,216.53) 75(303.15,236.22)
  oval 11.5x90 smd: 26(-236.22,-303.15) 27(-216.54,-303.15) 28(-196.85,-303.15) 29(-177.17,-303.15) 30(-157.48,-303.15) 31(-137.8,-303.15) 32(-118.11,-303.15) 33(-98.43,-303.15) 34(-78.74,-303.15) 35(-59.06,-303.15) 36(-39.37,-303.15) 37(-19.69,-303.15) 38(0,-303.15) 39(19.68,-303.15) 40(39.37,-303.15) 41(59.05,-303.15) 42(78.74,-303.15) 43(98.42,-303.15) 44(118.11,-303.15) 45(137.79,-303.15) 46(157.48,-303.15) 47(177.16,-303.15) 48(196.85,-303.15) 49(216.53,-303.15) 50(236.22,-303.15) 76(236.22,303.15) 77(216.53,303.15) 78(196.85,303.15) 79(177.16,303.15) 80(157.48,303.15) 81(137.79,303.15) 82(118.11,303.15) 83(98.42,303.15) 84(78.74,303.15) 85(59.05,303.15) 86(39.37,303.15) 87(19.68,303.15) 88(0,303.15) 89(-19.69,303.15) 90(-39.37,303.15) 91(-59.06,303.15) 92(-78.74,303.15) 93(-98.43,303.15) 94(-118.11,303.15) 95(-137.8,303.15) 96(-157.48,303.15) 97(-177.17,303.15) 98(-196.85,303.15) 99(-216.54,303.15) 100(-236.22,303.15)
  silkscreen extent -319,-319 319,319
TO263 [mil]
  rect 433.07x236.22 smd: 0(130,435)
  rect 50x120 smd: 1(0,0)
  oval 50x120 smd: 2(66.67,0) 3(133.33,0) 4(200,0) 5(266.67,0)
  silkscreen extent -100,100 360,600, body extent -71,-44 340,534, height 177
TO-262 [mm] "D2PAK"
  rect 2.32x3.81 smd: 1(-2.54,-9.77) 3(2.54,-9.77)
  rect 11x9.65 smd: 2(0,0)
  silkscreen extent -5.1,-6.35 5.1,-5.45, body extent -5.08,-11.35 5.08,4.41, height 4.5
"XTAL 5.0X7.0-SM" [mm]
  rect 1.5x2 smd: 1(-2.5,-2.1) 2(2.5,-2.1) 3(2.5,2.1) 4(-2.5,2.1)
  silkscreen extent -4.5,-2.65 3.7,2.65, body extent -3.55,-2.55 3.45,2.45, height 1.5
ZH1X2WT-1.5 [mm]
  rect 1.2x2.1 smd: 0(-2.85,1.95) 0(2.85,1.95)
  rect 0.7x2.5 smd: 1(-0.75,-1.95) 2(0.75,-1.95)
ZH1X4WT-1.5 [mm]
  rect 1.2x2.1 smd: 0(-4.35,1.95) 0(4.35,1.95)
  rect 0.7x2.5 smd: 1(-2.25,-1.95) 2(-0.75,-1.95) 3(0.75,-1.95) 4(2.25,-1.95)
ZH1X5WT-1.5 [mm]
  rect 1.2x2.1 smd: 0(-5.1,1.95) 0(5.1,1.95)
  rect 0.7x2.5 smd: 1(-3,-1.95) 2(-1.5,-1.95) 3(0,-1.95) 4(1.5,-1.95) 5(3,-1.95)
  body extent -4.4,-3 4.4,4.75, height 4.23
ZH1X6WT-1.5 [mm]
  rect 1.2x2.1 smd: 0(-5.85,1.95) 0(5.85,1.95)
  rect 0.7x2.5 smd: 1(-3.75,-1.95) 2(-2.25,-1.95) 3(-0.75,-1.95) 4(0.75,-1.95) 5(2.25,-1.95) 6(3.75,-1.95)
ZH1X7WT-1.5 [mm]
  rect 1.2x2.1 smd: 0(-6.6,1.95) 0(6.6,1.95)
  rect 0.7x2.5 smd: 1(-4.5,-1.95) 2(-3,-1.95) 3(-1.5,-1.95) 4(0,-1.95) 5(1.5,-1.95) 6(3,-1.95) 7(4.5,-1.95)
ZH1X8WT-1.5 [mm]
  rect 1.2x2.1 smd: 0(-7.35,1.95) 0(7.35,1.95)
  rect 0.7x2.5 smd: 1(-5.25,-1.95) 2(-3.75,-1.95) 3(-2.25,-1.95) 4(-0.75,-1.95) 5(0.75,-1.95) 6(2.25,-1.95) 7(3.75,-1.95) 8(5.25,-1.95)
ZH1X9WT-1.5 [mm]
  rect 1.2x2.1 smd: 0(-8.1,1.95) 0(8.1,1.95)
  rect 0.7x2.5 smd: 1(-6,-1.95) 2(-4.5,-1.95) 3(-3,-1.95) 4(-1.5,-1.95) 5(0,-1.95) 6(1.5,-1.95) 7(3,-1.95) 8(4.5,-1.95) 9(6,-1.95)

## Part data
C1 C7 C8 C19 C20 C53 C72 C86: library part ELECTRO, "Electrolytic Capacitor"
C2 C4 C6 C10 C11 C13 C14 C15 C16 C17 C18 C68 C70 C73 C74 C75 C79 C80 C81 C82 C83 C84 C88 C89 C90 C91 C92 C94 C95 C96 C97 C98 C99 C100 C101 C102 C103 C104 C105 C106 C108 C112 C113 C114 C115: library part CAP, "CAP"
C3 C9: library part Cap, "CAP"
C5 C12 C21 C22 C23 C24 C25 C26 C27 C28 C29 C30 C31 C32 C33 C34 C35 C36 C37 C38 C39 C40 C41 C42 C43 C44 C45 C46 C47 C48 C49 C50 C51 C52 C54 C55 C56 C57 C58 C59 C60 C61 C62 C63 C64 C65 C66 C67 C69 C71 C76 C77 C78 C85 C87 C93 C107 C109 C111: library part Cap, "Capacitor"
D3 D4 D5 D6 D9: library part DIODE-ZENER, "Small Signal Zener Diodes"
D7 D8: library part DIODE1, "Diode"
D10: library part DIODE-SWITCHING, "Silicon Epitaxial Planar Diodes"
D60 D61: library part LED
D62 D63 D64: library part P0080_1
F1 F2: library part FUSE2, "Fuse"
IC1: library part MAX232ACPE, "+5V Powered, Multi-Channel RS-232 Driver/Receiver"
IC2 IC3 IC4: library part SP3078EEN
J1 J12 J15 J16: library part HEADER1X6
J2: library part HEADER1X8
J3: library part "Header 2", "Header, 2-Pin"
J4 J5: library part "Header 9", "Header, 9-Pin"
J6 J17 J19: library part HEADER1X7
J7 J8: library part HEADER1X5
J9: library part "Header 8", "Header, 8-Pin"
J10 J11: library part HEADER1X4
J18: library part HEADER2X12
L1 L2 L3 L4: library part INDUCTOR, "INDUCTOR"
Q1 Q2 Q3 Q5 Q6: library part NPN, "NPN General Purpose Amplifier"
Q4: library part PMOS, "P-Channel 30-V (D-S), 150 C MOSFET"
R1 R9 R10 R11 R12 R20 R36 R37 R38 R43 R44 R45 R46 R51 R52 R53 R54 R57 R58 R62 R63 R64 R68 R97 R98 R99 R100 R101 R103: library part Res, "Resistor"
R2 R3 R4 R5 R6 R7 R8 R13 R14 R15 R16 R17 R18 R19 R21 R22 R23 R24 R25 R26 R27 R28 R29 R30 R31 R32 R33 R34 R35 R39 R40 R41 R42 R47 R48 R49 R50 R55 R56 R59 R60 R61 R65 R66 R67 R71 R72 R73 R77 R78 R79 R85 R86 R89 R90 R93 R102 R104 R105 R106 R107 R109 R110 R112 R113 R115 R116 R117 R118 R119 R120 R121 R122 R123: library part RES, "Resistor"
U1 U3: library part LM2575
U2: library part REG1117-3.3, "800mA and 1A Low Dropout Positive Regulator 2.85V, 3.3V, 5V, and Adjustable"
U4: library part REF192/5/7
U7: library part VB30200C
Y1: library part XTAL

## Free pads (board coordinates)
  round 275.59 hole 129.92: 0(0,6057.51) 0(393.7,152) 0(7480.32,152) 0(7874.02,6057.51)

## Via types
v1: diameter 30, hole 20, Top Layer to Bottom Layer, tented both sides, 229 vias
v2: diameter 60, hole 30, Top Layer to Bottom Layer, tented both sides, 35 vias
v3: diameter 50, hole 30, Top Layer to Bottom Layer, tented both sides, 22 vias
v4: diameter 80, hole 50, Top Layer to Bottom Layer, tented both sides, 12 vias
v5: diameter 50, hole 28, Top Layer to Bottom Layer, tented both sides, 4 vias
v6: diameter 24, hole 16, Top Layer to Bottom Layer, tented both sides, 1 vias
v7: diameter 30, hole 16, Top Layer to Bottom Layer, tented both sides, 1 vias

## Nets (pads, with @x,y where several pads share a name; then routed paths per layer and width w, separated by ;. In a path a pad name is that pad's centre, name@x,y a point inside that pad or via, vN(x,y) a via of type N, cw(c..) or ccw(c..) an arc to the next point about the centre after c; other vN are vias at no path point)
12V: C1.1 C2.2 C3.2 C8.1 C19.1 C20.1 C21.2 C22.2 C53.1 C68.2 C70.2 C86.1 D4.2 D10.2 J6.4 J17.6 J18.5 J18.6 K1.6 K1.8 K2.8 Q4.2 R4.1 R5.1 U1.1 U3.1 | length 25230.3
  Top Layer w20: D10.2@5526.7,3439.07 5560.78,3439.07 5653.7,3532 5951.98,3532 C68.2@6041.11,3442.87 ; 7076.63,2452.07 7153.7,2375 v3@7408.7,2375 ; R5.1@7286.63,2492.29 7286.63,2520.85 7307.7,2541.92 7422.78,2541.92 v3(7416.7,2548)
  Top Layer w50: J17.6@482.7,2241 409.7,2241 176.2,2007.5 176.2,1625.3 117.7,1566.8 117.7,583.02 114.7,580.02 114.7,531.98 278.24,368.44 5119.15,368.44 v3(5120.7,370) ; C3.2@6031.43,2172.87 6025.53,2178.77 C2.2@6025.53,2271.29 6030.53,2276.3 U1.1@6222.6,2276.3 U1.1@6278,2276.3 ; C70.2@6047.01,3334.02 6048.06,3335.07 6048.06,3449.83 U3.1@6222.6,3449.83 6324.53,3449.83 6353.7,3479 v4(6353.7,3587) 6353.7,3924 6387.69,3957.98 C8.1@6517.7,3957.98 ; K1.6@6073.7,4374 6371.7,4374 ; D4.2@6477,1481.34 D4.2@6480.58,1484.93 ; C21.2@6717,1484.93 D4.2@6480.58,1484.93 ; C22.2@6717,1669.93 6665.58,1669.93 D4.2@6480.58,1484.93 ; C53.1@6727.7,3957.98 C8.1@6517.7,3957.98 ; v3(6899.7,5997) 6930.7,5966 v3(6930.7,5507) ; v3(7069.7,4820) 7005.7,4756 6616.7,4756 6585.7,4725 6585.7,4613 6538.7,4566 6424.7,4566 6396.7,4538 6396.7,4399 6371.7,4374 ; 6371.7,4374 K1.8@6473.7,4374 6517.7,4330 C8.1@6517.7,3957.98
  Top Layer w80: v4(5005.7,514) 5130.7,639 5130.7,1816 5241.7,1927 5540.7,1927 5683.7,1784 5953.3,1784 Q4.2@6082,1655.3 Q4.2@6107,1680.3 ; Q4.2@6071,1680.3 Q4.2@6082,1680.3 ; v4(6318.7,2601) 6318.7,2789.61 6365.7,2836.61 6841.09,2836.61 6888.7,2789 6888.7,2543 6939.7,2492 ; v4(6335.7,1864) 6290.7,1864 Q4.2@6107,1680.3 ; v4(6429.7,929) 6438.02,937.31 C20.1@6438.02,1065 C19.1@6438.02,1271.3 6438.02,1442.36 D4.2@6477,1481.34 6455.95,1481.34 6257,1680.3 Q4.2@6107,1680.3 ; 6946.7,2489 R4.1@7073.33,2489
  Bottom Layer w20: v3(7408.7,2368) 7416.7,2376 v3(7416.7,2548)
  Bottom Layer w50: J18.6@4286.75,5663.97 J18.5@4286.75,5763.97 4286.75,5934.75 4352,6000 6896.7,6000 v3(6899.7,5997) ; v4(5005.7,514) 5120.7,399 v3(5120.7,370) ; K2.8@5596.7,4374 5596.7,4445 5624.7,4473 5974.7,4473 K1.6@6073.7,4374 ; v3(6930.7,5507) 7069.7,5368 v3(7069.7,4820)
  Bottom Layer w80: v4(6335.7,1864) 6278.7,1921 v3(6278.7,2277) 6278.7,2572 6353.7,2647 v4(6353.7,3587) ; v4(6429.7,929) 6974.7,929 7040.7,995 7040.7,1300 6985.7,1355 6927.7,1355 J6.4@6926.7,1356
12V_OUT: J14.7 J14.8 J14.9 J14.10 K1.5 | length 5921.2
  Top Layer w80: 4180,548 4168,560 4168,720 4226,778 v4(4301.7,778) ; v4@4997.7,4489.37 5658.33,4489.37 5737.2,4410.5
  Bottom Layer w80: v4(4301.7,778) 4895.7,778 5068.7,951 5068.7,4024 4959.7,4133 4823.7,4133 4758.7,4198 4758.7,4473 4774.7,4489 v4(4997.7,4489)
+2.5V_S: C67.1 C69.1 C77.1 C78.1 C82.2 C83.2 C84.2 C90.1 C91.1 C94.1 J10.1 J11.1 U4.6 U5.21 | length 11621
  Top Layer w10: C94.1@2132,5677.86 2132,5640.7 2148.7,5624 2268.7,5624 2322.05,5570.66 2322.05,5457.2 2358.52,5420.73 U5.21@2358.52,5303.44
  Top Layer w30: J11.1@281.77,4850.11 478.85,4850.11 C67.1@491.03,4837.93 v1(599.35,4837.93) ; C94.1@2132,5677.86 C91.1@2046.06,5677.86 1906.84,5677.86 1889.7,5695 1889.7,6023 1999.7,6133 6721.7,6133 6792.2,6062.5 v1@6792.2,5760.5 ; C84.2@6693.7,5035.61 6798.5,5035.61 C82.2@6804.41,5029.71 ; U4.6@6828.12,4864.05 6828.12,5006 C82.2@6804.41,5029.71 ; v5(7178.7,4898) 7038.12,4898 C83.2@6906.41,5029.71 C82.2@6804.41,5029.71 ; v1(7220.7,5114) C78.1@7267.02,5067.68 ; C78.1@7276.5,5058.21 7285.98,5048.73 7534.78,5048.73 ; v1(7511.7,5074) 7511.7,5071.8 7534.78,5048.73 ; J10.1@7556.23,5027.27 7534.78,5048.73
  Bottom Layer w20: v1(599.35,4837.93) 599.35,4919.35 518.04,5000.67 518.04,5620.33 720.7,5823 v1(1892.7,5823) ; v5(7178.7,4898) 7217.7,4937 7217.7,5111 v1(7220.7,5114)
  Bottom Layer w30: v1(6790.7,5759) 7304.7,5759 7511.7,5552 v1(7511.7,5074)
+3.3V_A: C99.2 C101.2 C103.2 L4.2 U5.22 | length 619.9
  Top Layer w10: C103.2@2215,5552.79 2292.91,5552.79 2304.05,5541.66 2304.05,5449.75 2338.83,5414.96 U5.22@2338.83,5303.44
  Top Layer w30: L4.2@1954,5538.04 1976.62,5560.67 C99.2@2046.06,5560.67 2124.13,5560.67 C101.2@2132,5552.79 C103.2@2215,5552.79